# Altium PCB HeatingAC_Garage.PcbDoc
Units mil, origin at the board's own origin, x right, y up, seen from the top; angles counter-clockwise.
Board outline 6000 x 6000 mil, 4 copper layers (Top Layer, Internal Plane 1, Internal Plane 2, Bottom Layer); 50 components, 49 nets, 167 pads, 28 vias.
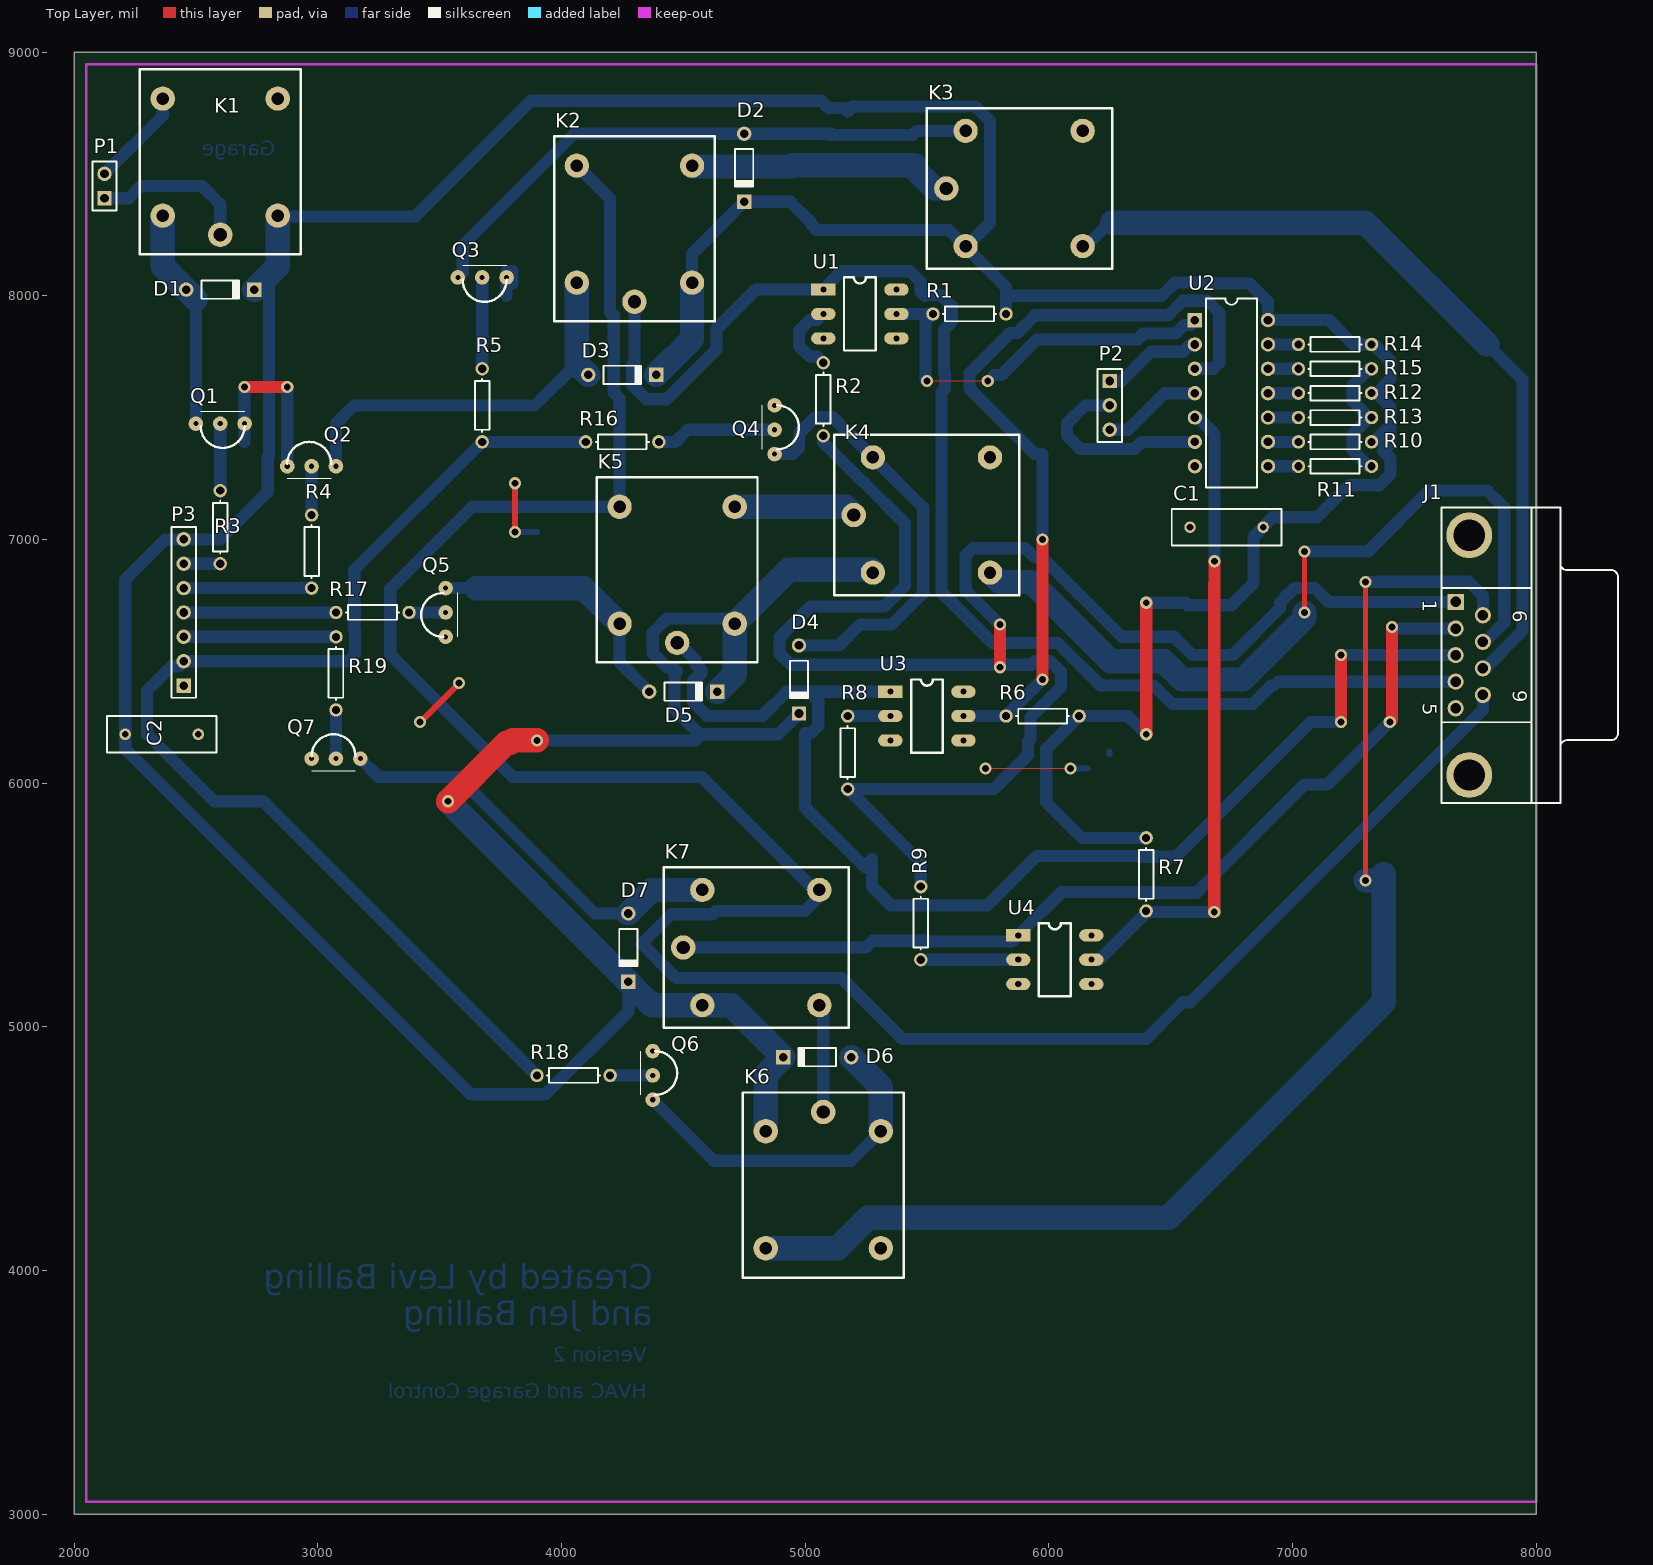
[diagram p0: Top Layer view]
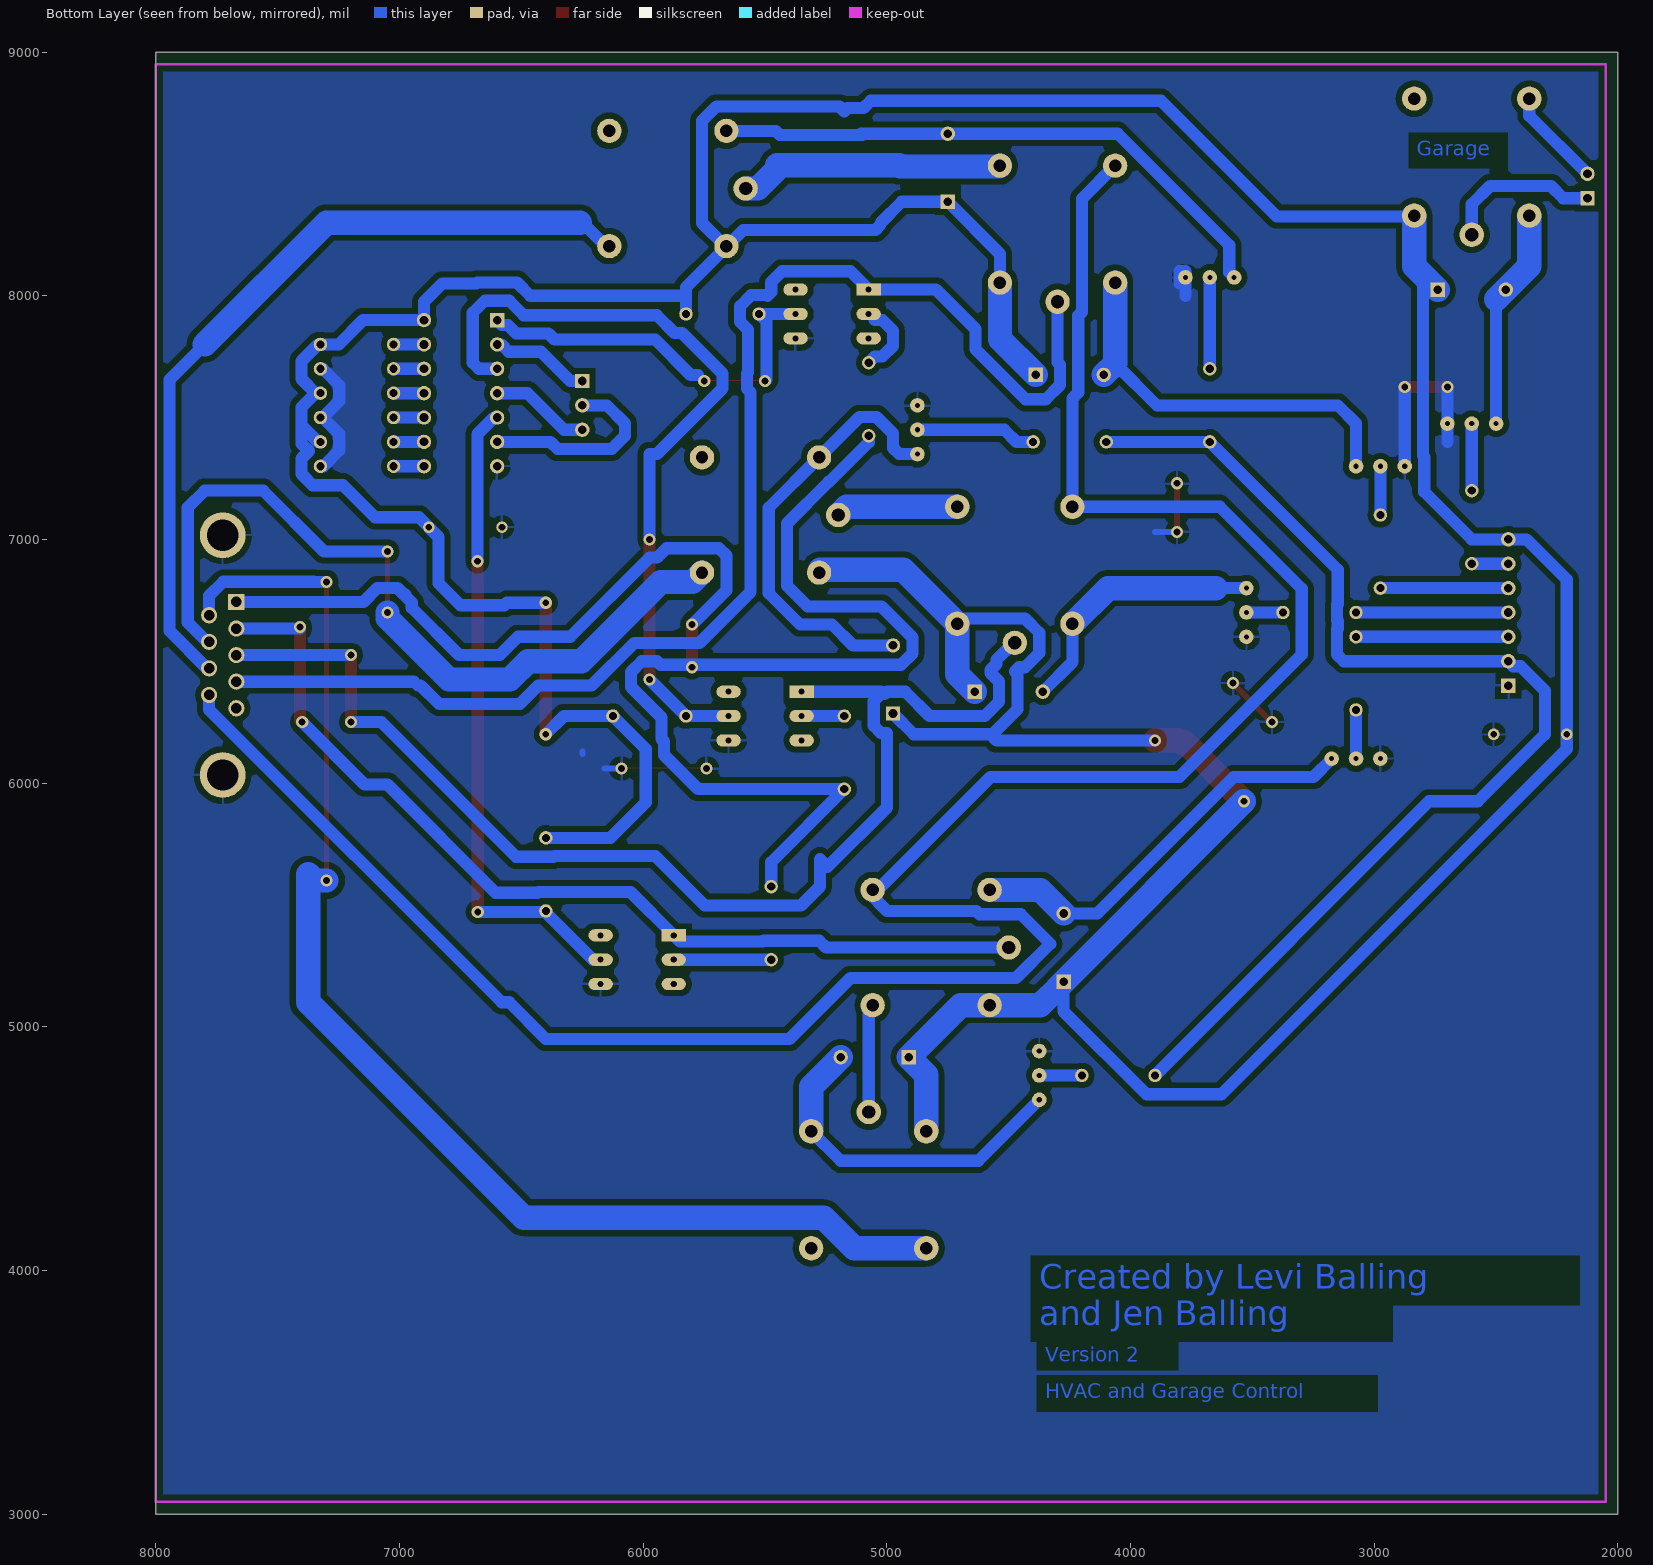
[diagram p1: Bottom Layer view, seen from below]
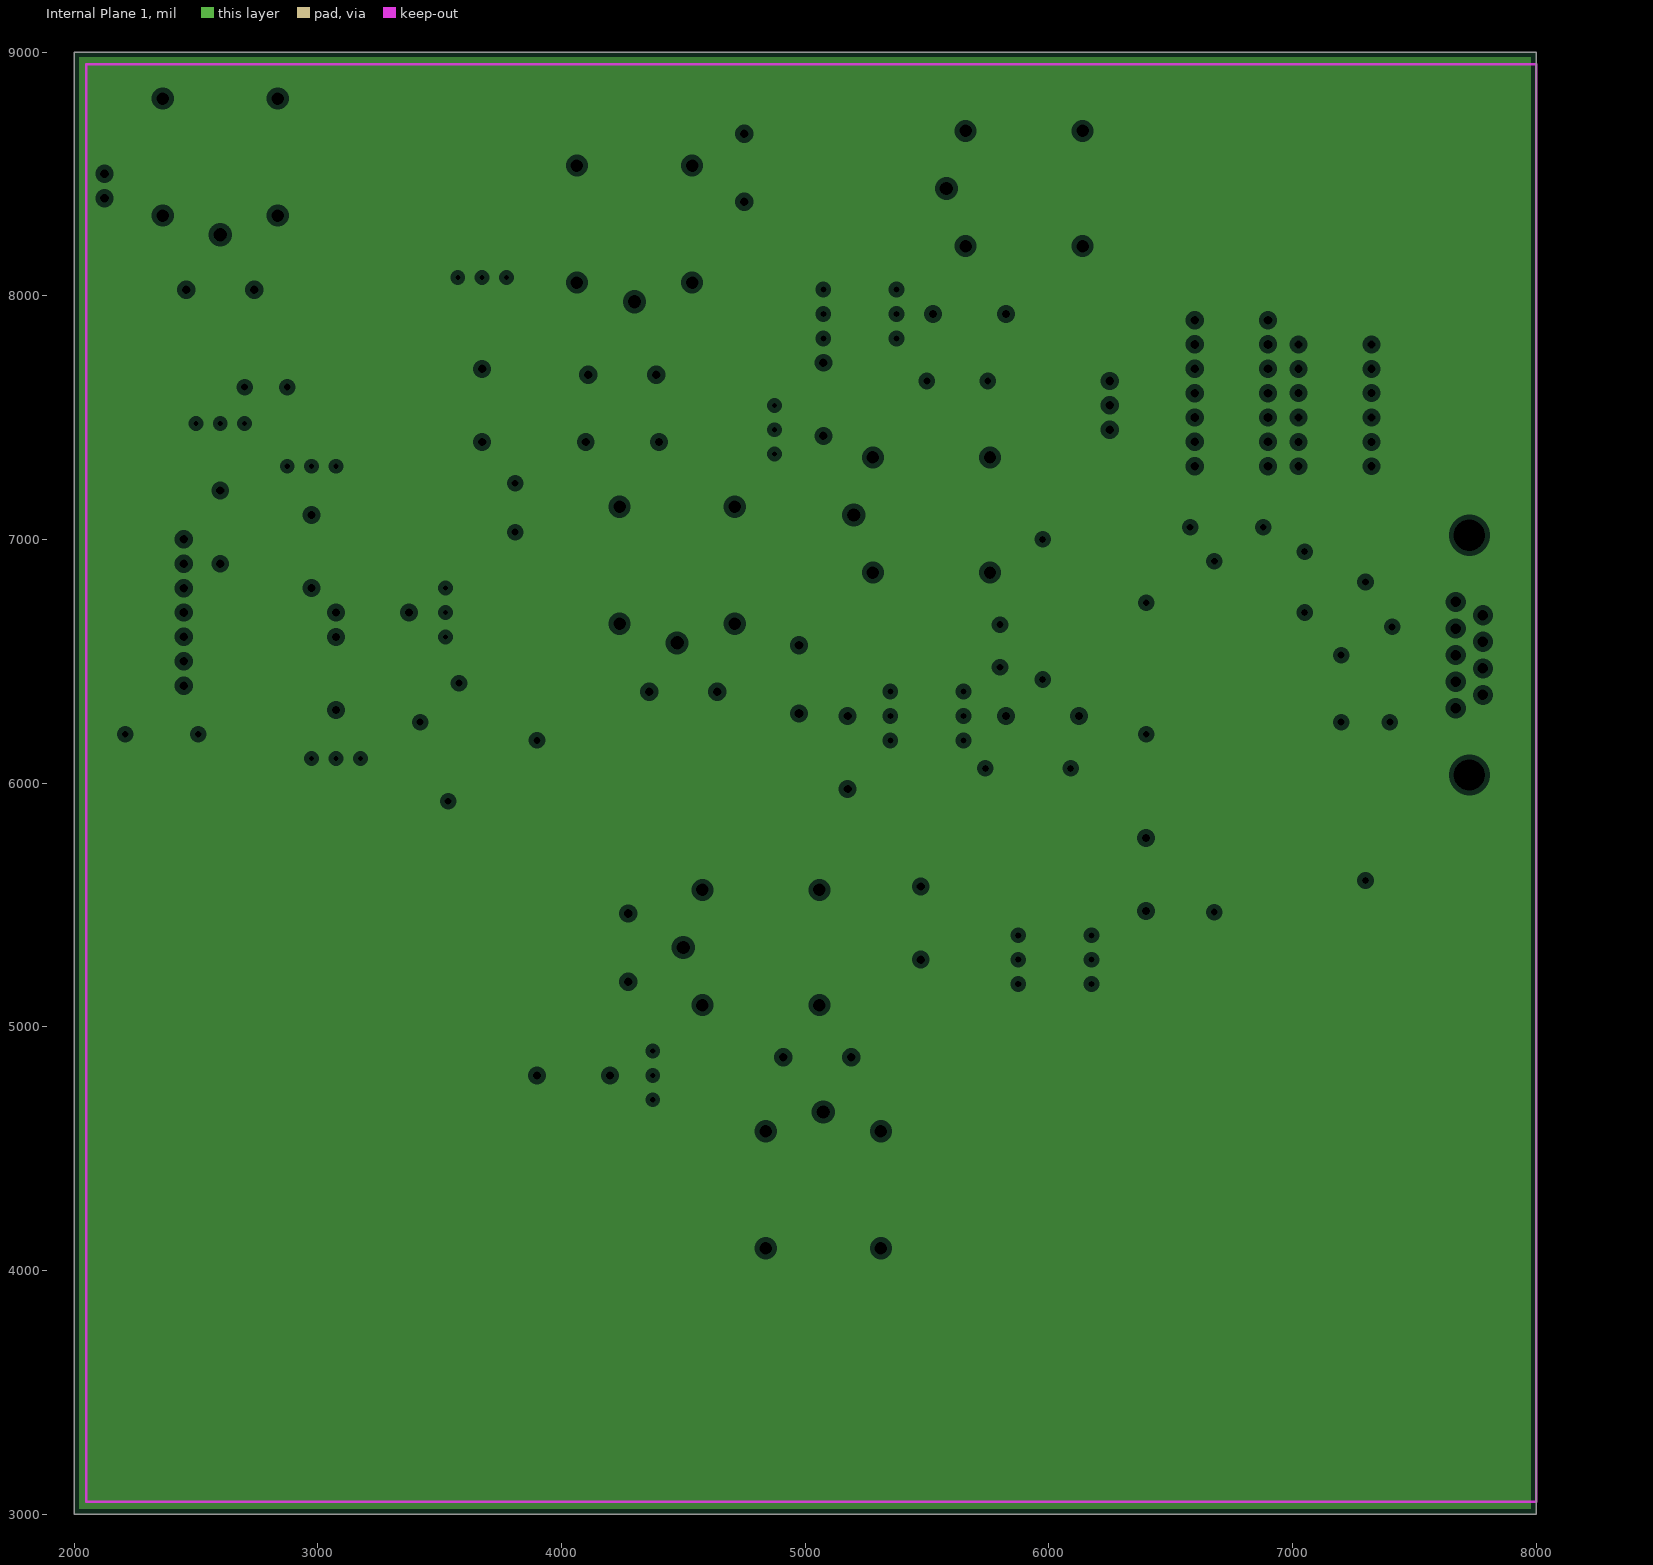
[diagram p2: Internal Plane 1, clearances drawn from the general rule]
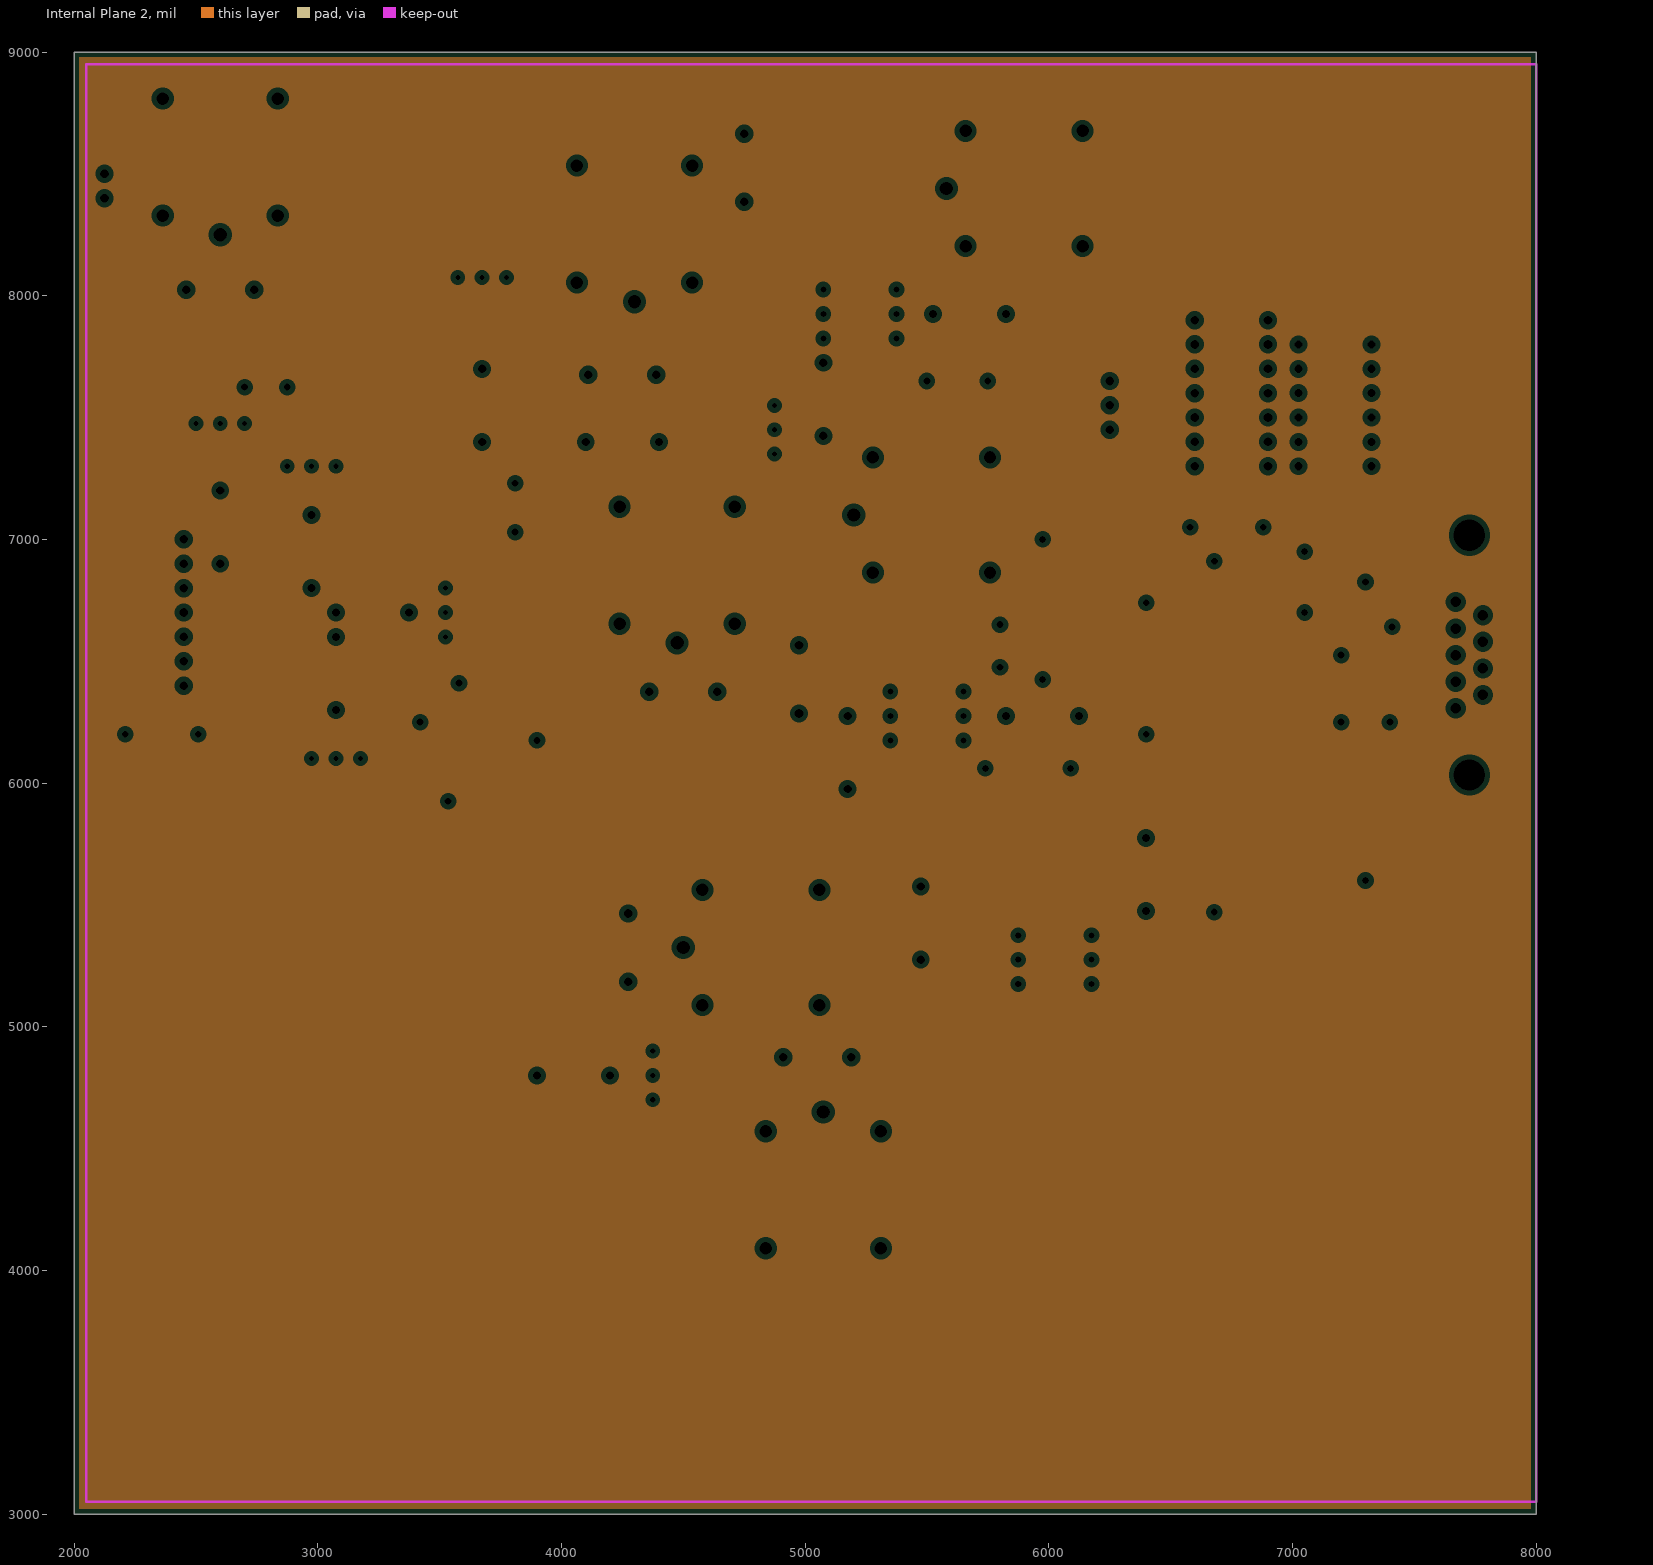
[diagram p3: Internal Plane 2, clearances drawn from the general rule]

## Layer stack, top to bottom
Top Layer: signal copper 1.4
Dielectric: dielectric 12.6, FR-4, Dk 4.8
Internal Plane 1: plane copper 1.4
Dielectric: dielectric 12.6, FR-4, Dk 4.8
Internal Plane 2: plane copper 1.4
Dielectric: dielectric 12.6, FR-4, Dk 4.8
Bottom Layer: signal copper 1.4

## Board outline
2000,3000 8000,3000 8000,9000 2000,9000

## Design rules (kind name [scope] priority, off if disabled: settings)
Clearance [All] p1: gap=25
PlaneClearance [All] p1: clearance=20
PlaneConnect [All] p1: planeconnectstyle=Relief reliefexpansion=20 reliefentries=4 reliefconductorwidth=10 reliefairgap=10
PolygonConnect [All] p1: connectstyle=Relief reliefconductorwidth=10 reliefentries=4 polygonreliefangle="90 Angle"
RoomDefinition HeatingAC_Garage [InComponentClass('HeatingAC_Garage')] p1: confinementstyle=ConfineIn formatcopy=TRUE lockcomponents=FALSE outline 2050,8950 8000,8950 8000,3050 2050,3050
RoutingVias [All] p1: holewidth=32 width=62 viastyle="Through Hole" minholewidth=28 minwidth=50 maxholewidth=28 maxwidth=50
SilkscreenOverComponentPads [All] p1: minsilkscreentomaskgap=10
SolderMaskExpansion [All] p1: expansion=4
Width [All] p1: maxlimit=100 minlimit=5 preferedwidth=25 bottomlayer_minwidth=25 minimp=50.000000 maximp=50.000000 favimp=50.000000
25 further rules are at their usual default settings.

## Classes and differential pairs
component class HeatingAC_Garage: *1 *2 *3 C1 C2 D1 D2 D4 D5 D6 J1 K1 K2 K3 K4 K5 K6 K7 P1 P2 P3 Q1 Q2 Q3 Q4 Q6 R1 R2 R3 R4 R5 R7 R8 R9 R10 R11 R13 R14 R15 R16 R17 R18 U1 U2 U3 U4

## Components (designator, comment, footprint, x,y, rotation, side; value= is the part's Value field where it differs from the comment)
C1 "Cap" RAD-0.3 6730,7050 r0 top
C2 "Cap" RAD-0.3 2360,6200 r180 top
D1 "Diode 1N4148" DO-35 2600,8025 r0 top
D2 "Diode 1N4148" DO-35 4750,8525 r270 top
D3 "Diode 1N4148" DO-35 4250,7675 r0 top
D4 "Diode 1N4148" DO-35 4975,6425 r270 top
D5 "Diode 1N4148" DO-35 4500,6375 r0 top
D6 "Diode 1N4148" DO-35 5050,4875 r180 top
D7 "Diode 1N4148" DO-35 4275,5325 r270 top
J1 "D Connector 9" DSUB1.385-2H9 8100,6525 r270 top
K1 "SPDT -TAYDA" "Relay  SPDT Tayda" 2600,8250 r180 top
K2 "SPDT -TAYDA" "Relay  SPDT Tayda" 4300,7975 r180 top
K3 "SPDT -TAYDA" "Relay  SPDT Tayda" 5580,8440 r90 top
K4 "SPDT -TAYDA" "Relay  SPDT Tayda" 5200,7100 r90 top
K5 "SPDT -TAYDA" "Relay  SPDT Tayda" 4475,6575 r180 top
K6 "SPDT -TAYDA" "Relay  SPDT Tayda" 5075,4650 r0 top
K7 "SPDT -TAYDA" "Relay  SPDT Tayda" 4500,5325 r90 top
P1 "Header 2" HDR1X2 2125,8400 r90 top
P2 "Header 3" HDR1X3 6250,7650 r270 top
P3 "Header 7" HDR1X7 2450,6400 r90 top
Q1 "2N3904" 2N3904 2700,7475 r180 top
Q2 "2N3904" 2N3904 2875,7300 r0 top
Q3 "2N3904" 2N3904 3775,8075 r180 top
Q4 "2N3904" 2N3904 4875,7550 r270 top
Q5 "2N3904" 2N3904 3525,6600 r90 top
Q6 "2N3904" 2N3904 4375,4900 r270 top
Q7 "2N3904" 2N3904 2975,6100 r0 top
R1 "Res1" AXIAL-0.3 5675,7925 r0 top
R2 "Res1" AXIAL-0.3 5075,7575 r90 top
R3 "Res1" AXIAL-0.3 2600,7050 r90 top
R4 "Res1" AXIAL-0.3 2975,6950 r90 top
R5 "Res1" AXIAL-0.3 3675,7550 r90 top
R6 "Res1" AXIAL-0.3 5975,6275 r0 top
R7 "Res1" AXIAL-0.3 6400,5625 r90 top
R8 "Res1" AXIAL-0.3 5175,6125 r90 top
R9 "Res1" AXIAL-0.3 5475,5425 r270 top
R10 "Res1" AXIAL-0.3 7175,7400 r180 top
R11 "Res1" AXIAL-0.3 7175,7300 r0 top
R12 "Res1" AXIAL-0.3 7175,7600 r180 top
R13 "Res1" AXIAL-0.3 7175,7500 r0 top
R14 "Res1" AXIAL-0.3 7175,7800 r180 top
R15 "Res1" AXIAL-0.3 7175,7700 r0 top
R16 "Res1" AXIAL-0.3 4250,7400 r0 top
R17 "Res1" AXIAL-0.3 3225,6700 r0 top
R18 "Res1" AXIAL-0.3 4050,4800 r0 top
R19 "Res1" AXIAL-0.3 3075,6450 r270 top
U1 "OptoCoupler" Octocoupler 5075,8025 r0 top
U2 "SN7416N" N014 6750,7600 r270 top
U3 "OptoCoupler" Octocoupler 5350,6375 r0 top
U4 "OptoCoupler" Octocoupler 5875,5375 r0 top

## Footprints (in the part's own frame and the unit in brackets; to place one, negate y for a bottom-side part, rotate by r counter-clockwise, add the part's x,y. Pads: shape width x height; smd on the part's side, far side on the other; paste and mask are expansions set on the pad)
2N3904 [mil] "simple transistor, but bigger holes and pads"
  round 60 hole 21: 1(0,0) 2(100,0) 3(200,0)
  silkscreen extent 0,-50 180,100
AXIAL-0.3 [mm] "Axial Device, Thru-Hole; 2 Leads; 0.3 in Pin Spacing"
  round 1.4 hole 0.85: 1(-3.81,0) 2(3.81,0)
  silkscreen extent -2.77,-0.76 2.77,0.76
DO-35 [mm] "Diode, Axial; Body 3.8 x 1.9 mm (LxDia. max), Lead Dia. 0.53 mm (max)"
  round 1.5 hole 0.9: 1(-3.55,0)
  rect 1.5x1.5 hole 0.9: 2(3.55,0)
  silkscreen extent -1.95,-0.95 2.05,0.95
DSUB1.385-2H9 [mm] "Connector; D Subminiature; 9 Position; Right Angle; Pitch 1.385 mm"
  rect 1.69x1.69 hole 1.09: 1(-5.54,-10.92)
  round 1.69 hole 1.09: 2(-2.77,-10.92) 3(0,-10.92) 4(2.77,-10.92) 5(5.54,-10.92) 6(-4.155,-8.08) 7(-1.385,-8.08) 8(1.385,-8.08) 9(4.155,-8.08)
  round 4.76 hole 3.26: 10(-12.495,-9.5) 11(12.495,-9.5)
  silkscreen extent -15.4,-12.4 15.4,6
HDR1X2 [mm] "Connector; Header; 2 Position"
  rect 1.5x1.5 hole 0.9: 1(0,0)
  round 1.5 hole 0.9: 2(2.54,0)
  silkscreen extent -1.27,-1.27 3.81,1.27
HDR1X3 [mm] "Connector; Header; 3 Position"
  rect 1.5x1.5 hole 0.9: 1(0,0)
  round 1.5 hole 0.9: 2(2.54,0) 3(5.08,0)
  silkscreen extent -1.27,-1.27 6.35,1.27
HDR1X7 [mm] "Connector; Header; 7 Position"
  rect 1.5x1.5 hole 0.9: 1(0,0)
  round 1.5 hole 0.9: 2(2.54,0) 3(5.08,0) 4(7.62,0) 5(10.16,0) 6(12.7,0) 7(15.24,0)
  silkscreen extent -1.27,-1.27 16.51,1.27
N014 [mm] "DIP; 14 Leads; Row Spacing 7.62 mm; Pitch 2.54 mm"
  rect 1.5x1.5 hole 0.9: 1(-7.62,-3.81)
  round 1.5 hole 0.9: 2(-5.08,-3.81) 3(-2.54,-3.81) 4(0,-3.81) 5(2.54,-3.81) 6(5.08,-3.81) 7(7.62,-3.81) 8(7.62,3.81) 9(5.08,3.81) 10(2.54,3.81) 11(0,3.81) 12(-2.54,3.81) 13(-5.08,3.81) 14(-7.62,3.81)
  silkscreen extent -9.85,-2.65 9.85,2.65
Octocoupler [mil]
  rect 100x50 hole 25: 1(0,0)
  oval 100x50 hole 25: 2(0,-100) 3(0,-200) 4(300,-200) 5(300,-100) 6(300,0)
  silkscreen extent 85,-250 215,50
RAD-0.3 [mm] "Radial Cap, Thru-Hole; 2 Leads; 0.3 in Pin Spacing"
  round 1.2 hole 0.7: 1(-3.81,0) 2(3.81,0)
  silkscreen extent -5.71,-1.91 5.71,1.91
"Relay  SPDT Tayda" [mm] "this is the ATTC-3372"
  round 2.54 hole 1.4: 0(0,0)
  round 2.54 hole 1.3: 1(6,-2) 2(-6,-2) 3(6,-14.2) 4(-6,-14.2)
  silkscreen extent -8.38,-17.27 8.38,2.03

## Part data
C1 C2: "Capacitor"
D1 D2 D3 D4 D5 D6 D7: "High Conductance Fast Diode"
J1: "Receptacle Assembly, 9 Position, Right Angle"
K1 K2 K3 K4 K5 K6 K7: library part SPDT
P1: "Header, 2-Pin"
P2: "Header, 3-Pin"
P3: "Header, 7-Pin"
Q1 Q2 Q3 Q4 Q5 Q6 Q7: "NPN General Purpose Amplifier"
R1 R2 R3 R4 R5 R6 R7 R8 R9 R10 R11 R12 R13 R14 R15 R16 R17 R18 R19: "Resistor"
U2: "Hex Inverter Buffer / Driver with High-Voltage Outputs"

## Via types
v1: diameter 50, hole 28, Top Layer to Bottom Layer, 28 vias

## Nets (pads, with @x,y where several pads share a name; then routed paths per layer and width w, separated by ;. In a path a pad name is that pad's centre, name@x,y a point inside that pad or via, vN(x,y) a via of type N, cw(c..) or ccw(c..) an arc to the next point about the centre after c; other vN are vias at no path point)
24VAC_GND: J1.1 R2.1 R8.1 R9.1 | length 7204.9
  Top Layer w50: v1(5800,6475) v1(5800,6650)
  Bottom Layer w50: R2.1@5075,7398.54 5237.32,7236.22 5238.78,7236.22 5410,7065 5410,6810 5325,6725 5022.77,6725 4895.47,6597.71 4895.47,6531.82 4942.06,6485.24 5929.17,6485.24 5943.93,6500 6006.07,6500 6050,6456.07 6050,6393.93 5925,6268.93 5925,6181.07 5915,6171.07 5915,6115 5775,5975 R8.1 5475,5675 R9.1 ; v1(5800,6650) 5659.06,6790.94 5659.06,6934.06 5688.78,6963.78 5905.15,6963.78 5943.93,6925 5975,6925 6300,6600 6513.91,6600 6588.91,6525 6756.07,6525 6950,6718.93 6950,6741.42 7008.58,6800 7091.42,6800 7148.31,6743.11 J1.1 ; 6978.58,6770 6973.93,6770 6980,6776.07 6980,6771.42
AC_G_LINE_IN: J1.4 K2.0 U1.1 | length 5544.3
  Bottom Layer w50: K2.0 4300,7726.66 4289.76,7716.42 4289.76,7633.58 4348.34,7575 4431.19,7575 4636.22,7780.04 4636.22,7862.88 4798.34,8025 U1.1 5150,8100 5431.07,8100 5475,8056.07 5475,8015 5490,8000 5490.31,8000 5492.87,8002.56 5557.13,8002.56 5602.56,7957.13 5602.56,7892.87 5599.84,7890.16 5570,7860.31 5570,7686.07 5575,7681.07 5575,7618.93 5560,7603.93 5560,6783.93 5768.93,6575 6037.13,6575 6212.13,6400 6431.07,6400 6506.07,6325 6838.91,6325 6913.91,6400 6925,6400 ; 6940.94,6415.94 J1.4
AC_G_LINE_OUT: J1.8 K3.4 | length 3374
  Bottom Layer w50: K3.4 6153.78,8203.78 6260,8310 ; J1.8 7790.59,6470.47 7944.69,6624.56 7944.69,7655.31 7800,7800
  Bottom Layer w100: 6260,8300 7300,8300 7800,7800
AC_W_LINE_IN: J1.3 K5.0 U3.1 | length 5212.2
  Top Layer w50: v1(7200,6250) v1(7200,6525)
  Bottom Layer w50: K5.0 4481.07,6575 4550,6506.07 4550,6488.79 4575,6463.79 4575,6451.66 4539.76,6416.42 4539.76,6333.58 4598.34,6275 4825,6275 4925,6375 5000,6375 5010.24,6364.76 5025.24,6364.76 5054.53,6335.47 5054.53,6235 5025.24,6205.71 5001.54,6205.71 5000,6204.17 5000,5900 5243.75,5656.25 5275,5687.5 5275,5575 5352.56,5497.44 5747.44,5497.44 5950,5700 6365.31,5700 6367.87,5697.44 6522.44,5697.44 7075,6250 v1(7200,6250) ; 5025,6375 U3.1 ; v1(7200,6525) J1.3
AC_W_LINE_OUT: J1.7 K4.4 | length 3394.1
  Top Layer w20: v1(7050,6700) v1(7050,6950)
  Bottom Layer w50: v1(7050,6950) 7310,6950 7560,7200 7800,7200 7869.69,7130.31 7869.69,6658.62 7790.59,6579.53 J1.7
  Bottom Layer w100: K4.4 5797.83,6825 5928.55,6825 6253.55,6500 6472.49,6500 6547.49,6425 6797.49,6425 7050,6677.51 v1(7050,6700)
AC_Y_LINE_IN: J1.2 K7.0 U4.1 | length 3950
  Top Layer w50: v1(7400,6250) 7409.06,6259.06 v1(7409.06,6640.94)
  Bottom Layer w50: K7.0 5250,5325 5277.56,5352.56 5507.13,5352.56 5509.69,5350 5850,5350 U4.1 6052.56,5552.56 6432.13,5552.56 6434.69,5550 6606.07,5550 7050,5993.93 7143.93,5993.93 v1(7400,6250) ; v1(7409.06,6640.94) 7409.06,6634.06 J1.2
AC_Y_LINE_OUT: J1.6 K6.4 | length 5374
  Top Layer w20: v1(7300,5600) v1(7300,6825)
  Bottom Layer w50: v1(7300,6825) 7350,6825 ; 7351.38,6826.38 7724.06,6826.38 7781.89,6768.55 J1.6
  Bottom Layer w100: K6.4 5134.44,4090.94 5259.44,4215.94 6490.94,4215.94 7375,5100 7375,5625 7350,5600 v1(7300,5600)
G_TRIGGER: P2.1 U2.2 | length 412.1
  Bottom Layer w50: P2.1 6300,7650 6420,7770 6552.37,7770 6582.37,7800 U2.2
GARAGE_LINE_IN: K1.0 P1.1 | length 651.8
  Bottom Layer w50: P1.1 2225,8400 2275,8450 2525,8450 2600,8375 K1.0
GARAGE_LINE_OUT: K1.3 P1.2 | length 408
  Bottom Layer w50: P1.2 2363.78,8738.78 K1.3
GARAGE_SWITCH: P3.6 R3.1 | length 150
  Bottom Layer w50: P3.6 R3.1
GND: C1.1 C2.1 J1.10 J1.11 P3.1 Q1.1 Q2.1 Q3.1 Q4.1 Q5.1 Q6.1 Q7.1 R11.2 R13.2 R15.2 U1.4 U2.7 U3.4 U4.4 | length 2342.4
  Top Layer w5: v1(5740,6060) v1(6090,6060)
  Top Layer w25: v1(3420,6250) v1(3580,6410) ; v1(3810,7030) v1(3810,7230)
  Top Layer w50: v1(2700,7625) v1(2875,7625)
  Bottom Layer w25: v1(3810,7030) 3900,7030 ; v1(6090,6060) 6160,6060 ; 6250,6120 6250,6130
  Bottom Layer w50: 2700,7400 Q1.1 v1(2700,7625) ; Q2.1 v1(2875,7625) ; 3775,8000 Q3.1@3775,8050 ; Q3.1 3775,8100 3800,8100 3800,8050 ; R11.2@7312.76,7300 7247.44,7365.31 7247.44,7432.13 7315.31,7500 7247.44,7567.87 7247.44,7632.13 7315.31,7700 R15.2
NetD1_1: D1.1 K1.1 Q1.3 | length 910.2
  Bottom Layer w50: Q1.3 2500,7985.24
  Bottom Layer w100: K1.1 2363.78,8121.46 D1.1 2500,7985.24
NetD2_1: D2.1 K3.1 Q3.3 | length 2405.4
  Bottom Layer w50: Q3.3 3595,8095 3595,8206.7 4053.07,8664.76 D2.1 5105.24,8664.76 ; 5100,8660 5440,8660 5456.22,8676.22 K3.1
NetD3_1: D3.1 K2.1 Q2.3 | length 1663.8
  Bottom Layer w50: Q2.3 3075,7475 3150,7550 3892.32,7550 4063.78,7721.46
  Bottom Layer w100: K2.1 4063.78,7721.46 D3.1
NetD4_1: D4.1 K4.1 Q4.3 | length 1812.2
  Bottom Layer w50: Q4.3 4950,7350 4975,7375 4975,7434.69 5042.87,7502.56 5112.4,7502.56 K4.1 5485,7129.96 5485,6778.93 5356.07,6650 5225,6650 5139.76,6564.76 D4.1
NetD5_1: D5.1 K5.1 Q5.3 | length 1103.4
  Bottom Layer w50: Q5.3 3650,6800 ; K5.1 4238.78,6496.46 D5.1
  Bottom Layer w100: 3650,6800 4092.52,6800 K5.1
NetD6_1: D6.1 K6.1 Q6.3 | length 1444.1
  Bottom Layer w50: Q6.3 4625,4450 5189.96,4450 K6.1
  Bottom Layer w100: D6.1 5311.22,4753.54 K6.1
NetD7_1: D7.1 K7.1 Q7.3 | length 1706.8
  Bottom Layer w50: Q7.3 3250,6025 3576.66,6025 4136.89,5464.76 D7.1
  Bottom Layer w100: D7.1 4371.46,5561.22 K7.1
NetK2_4: K2.4 K3.0 | length 1095.7
  Bottom Layer w100: K2.4 4540.28,8530 4945,8530 4950.04,8535.04 5450,8535.04 5450,8520 5530,8440 K3.0
NetK4_0: K4.0 K5.4 | length 502.9
  Bottom Layer w100: K5.4 5165.94,7134.06 K4.0
NetK6_0: K6.0 K7.4 | length 445.4
  Bottom Layer w50: K7.4 5075,5072.83 K6.0
NetQ1_2: Q1.2 R3.2 | length 275
  Bottom Layer w50: R3.2 Q1.2
NetQ2_2: Q2.2 R4.2 | length 200
  Bottom Layer w50: R4.2 Q2.2
NetQ3_2: Q3.2 R5.2 | length 375
  Bottom Layer w50: R5.2 Q3.2
NetQ4_2: Q4.2 R16.2 | length 495.7
  Bottom Layer w50: R16.2 4468.32,7400 4518.32,7450 Q4.2
NetQ5_2: Q5.2 R17.2 | length 150
  Bottom Layer w50: R17.2 Q5.2
NetQ6_2: Q6.2 R18.2 | length 175
  Bottom Layer w50: R18.2 Q6.2
NetQ7_2: Q7.2 R19.2 | length 200
  Bottom Layer w50: Q7.2 R19.2
NetR1_1: R1.1 U1.5 U2.1 | length 1643.1
  Top Layer w5: v1(5500,7650) v1(5750,7650)
  Bottom Layer w25: v1(5750,7650) 5775,7675
  Bottom Layer w50: U1.5 R1.1 5495,7895 5495,7655 v1(5500,7650) ; 5775,7675 5806.07,7675 5951.07,7820 6363.93,7820 6388.93,7845 6521.3,7845 6555.83,7879.53 6579.53,7879.53 U2.1
NetR2_2: R2.2 U1.2 | length 283.9
  Bottom Layer w50: U1.2@5050,7900 5018.93,7900 4975,7856.07 4975,7793.93 5018.93,7750 5050,7750 R2.2
NetR6_1: R6.1 U2.3 U3.5 | length 3270
  Top Layer w50: v1(5975,6425) v1(5975,7000)
  Bottom Layer w50: U3.5 R6.1 v1(5975,6425) ; v1(5975,7000) 5975,7350 5943.93,7350 5675,7618.93 5675,7681.07 5841.37,7847.44 5872.44,7847.44 5945,7920 6490.23,7920 6549.76,7979.53 6650.24,7979.53 6700,7929.77 6700,7725 6675,7700 U2.3
NetR7_1: R7.1 U2.5 U4.5 | length 2656.6
  Top Layer w50: v1(6679.53,5470.47) 6679.53,6819.53 6680,6820 v1(6680,6910)
  Bottom Layer w50: U4.5 6206.07,5275 6400,5468.93 R7.1 ; R7.1@6404.53,5470.47 v1(6679.53,5470.47) ; U2.5 6612.47,7500 6680,7432.47 v1(6680,6910)
NetR8_2: R8.2 U3.2 | length 175
  Bottom Layer w50: R8.2 U3.2
NetR9_2: R9.2 U4.2 | length 400
  Bottom Layer w50: R9.2 U4.2
NetR10_2: R10.2 U2.9 | length 125
  Bottom Layer w50: U2.9 R10.2
NetR11_1: R11.1 U2.8 | length 125
  Bottom Layer w50: U2.8 R11.1
NetR12_2: R12.2 U2.11 | length 125
  Bottom Layer w50: U2.11 R12.2
NetR13_1: R13.1 U2.10 | length 125
  Bottom Layer w50: U2.10 R13.1
NetR14_2: R14.2 U2.13 | length 125
  Bottom Layer w50: U2.13 R14.2
NetR15_1: R15.1 U2.12 | length 125
  Bottom Layer w50: U2.12 R15.1
OFF_SWITCH: P3.2 R5.1 R16.1 R18.1 | length 4791.5
  Bottom Layer w50: R18.1 2775,5925 2575,5925 2300,6200 2300,6379.77 2399.76,6479.53 2429.53,6479.53 P3.2 3125,6500 3152.56,6527.56 3152.56,6632.13 3150,6634.69 3150,6665.31 3152.56,6667.87 3152.56,6732.13 3150,6734.69 3150,6875 R5.1 R16.1
PD5_G_FAN_SWITCH: P3.5 R4.1 | length 525
  Bottom Layer w50: P3.5 R4.1
PD6_W_HEAT_SWITCH: P3.4 R17.1 | length 625
  Bottom Layer w50: P3.4 R17.1
PD7_Y_COOL_SWITCH: P3.3 R19.1 | length 625
  Bottom Layer w50: P3.3 R19.1
VCC: C1.2 C2.2 D1.2 D2.2 D3.2 D4.2 D5.2 D6.2 D7.2 K1.2 K2.2 K3.2 K4.2 K5.2 K6.2 K7.2 P3.7 R1.2 R6.2 R7.2 R10.1 R12.1 R14.1 U2.14 | length 22572.1
  Top Layer w50: v1(6400,6200) v1(6400,6740)
  Top Layer w100: v1(3535.24,5925) 3775,6164.76 3789.76,6164.76 3800,6175 v1(3900,6175)
  Bottom Layer w50: 2800,8064.76 2800,7343.14 2795,7338.14 2795,7195 2600,7000 P3.7 2375,7000 2210,6835 2210,6140 3627.56,4722.44 3934.69,4722.44 4275,5062.76 D7.2 ; K1.2@2850,8325 3400,8325 3875,8800 5066.38,8800 5096.38,8770 5161.38,8770 5175,8756.38 5194.84,8776.22 5700.16,8776.22 5758.74,8717.64 5758.74,8298.74 K3.2@5660,8200 ; v1(3900,6175) 4550,6175 4575,6200 ; K2.2 4536.22,8171.46 D2.2 4939.76,8385.24 5025,8300 ; K5.2@4689.96,6675 4433.58,6675 4375,6616.42 4375,6533.58 4433.58,6475 4457.72,6475 4475,6457.72 4464.76,6447.49 4464.76,6302.51 4567.28,6200 4575,6200 ; D4.2 4889.76,6200 4575,6200 ; 5028.74,8288.78 5047.52,8270 5590,8270 K3.2@5660,8200 ; R7.2 6135,5775 5990,5920 5990,6140 R6.2 6325,6275 v1(6400,6200) ; v1(6400,6740) 6560,6740 6570,6730 6750,6730 6840,6820 6840,7010 6920.53,7090.53 7100.53,7090.53 7232.44,7222.44 7357.13,7222.44 7402.56,7267.87 7402.56,7332.13 7372.34,7362.34 7402.56,7392.56 7402.56,7467.87 ; R10.1 7334.69,7400 7402.56,7467.87 ; R14.1 7250,7800 7150,7900 U2.14 6900,7975 6825,8050 6685.83,8050 6681.3,8054.53 6518.7,8054.53 6464.17,8000 5825,8000 R1.2 5825,8035 K3.2@5660,8200 ; R14.1@7334.69,7800 7402.56,7732.13 7402.56,7657.66 7344.9,7600 7402.56,7542.34 7402.56,7467.87
  Bottom Layer w100: D1.2 2836.22,8121.46 K1.2 ; v1(3535.24,5925) D7.2 4300,5160.24 4300,5158.58 4358.58,5100 4360.24,5100 4371.46,5088.78 K7.2 4696.46,5088.78 D6.2 4838.78,4803.54 K6.2 ; D3.2 4536.22,7821.46 K2.2 ; D5.2 4711.22,6446.46 K5.2 4932.48,6875 K4.2@5275,6875
VCC24AC: J1.9 K2.3 K5.3 K7.3 | length 10050.5
  Bottom Layer w50: K2.3 4200,8397.83 4200,7933.58 4214.76,7918.81 4214.76,7602.51 4238.78,7578.5 K5.3 3634.06,7134.06 3297.44,6797.44 3297.44,6527.56 3800,6025 4575,6025 5038.78,5561.22 K7.3 ; K7.3@5075,5550 5000,5475 4633.94,5475 4620.16,5461.22 4451.22,5461.22 4330,5340 4470,5200 5150,5200 5400,4950 6400,4950 6550,5100 6580.95,5100 7781.89,6300.94 J1.9
W_TRIGGER: P2.3 U2.4 | length 412.1
  Bottom Layer w50: P2.3 6325,7450 6475,7600 U2.4
Y_TRIGGER: P2.2 U2.6 | length 815.9
  Bottom Layer w50: P2.2 6150,7550 6075,7475 6075,7425 6129.53,7370.47 6351.54,7370.47 6381.07,7400 U2.6
pads on no net: J1.5 K1.4 K3.3 K4.3 K6.3 U1.3 U1.6 U3.3 U3.6 U4.3 U4.6

## Polygon pours and split planes (outlines as drawn)
GND on Bottom Layer "Top Layer-No Net" (solid, shelved, pour order 2): 2050,8950 8000,8950 8000,3050 2050,3050
GND on Bottom Layer "Top Layer-No Net" (solid, pour order 4): 2050,8950 2050,3050 8000,3050 8000,8950
no net on Internal Plane 1 (split plane): 7979.9,3020.1 2020.1,3020.1 2020.1,8979.9 7979.9,8979.9
no net on Internal Plane 2 (split plane): 7979.9,3020.1 2020.1,3020.1 2020.1,8979.9 7979.9,8979.9

## Keep-outs
Keep-Out Layer:
  lines w10: 2050,3050 8000,3050 8000,8950 2050,8950 2050,3050

## Other copper
Bottom Layer:
  text "Garage" at 2825,8575 h60
  text "Created by Levi Balling" at 4375,3925 h100
  text "and Jen Balling" at 4375,3775 h100
  text "Version 2" at 4350,3625 h60
  text "HVAC and Garage Control" at 4350,3475 h60

## Silkscreen, mask and mechanical layers (free items; w line width, h text height)
Drill Drawing:
  text ".LEGEND" at 8200,3200 h60
  text "Drill Drawing." at 8200,3100 h60

## Dimensions
2050,3050 to 2050,8950 on Mechanical 1

## Text inside footprints (layer, text, board x,y; h text height)
J1: Top Overlay "6" at 7904.13,6708.27 h59.06 r270; Top Overlay "9" at 7904.13,6381.1 h59.06 r270; Top Overlay "5" at 7534.06,6326.57 h59.06 r270; Top Overlay "1" at 7534.06,6752.95 h59.06 r270